# Altium PCB DC_PCB.PcbDoc
Units mm, origin at the board's own origin, x right, y up, seen from the top; angles counter-clockwise.
Board outline 69.6 x 80.01 mm, 2 copper layers (Top Layer, Bottom Layer); 24 components, 20 nets, 112 pads, 0 vias.
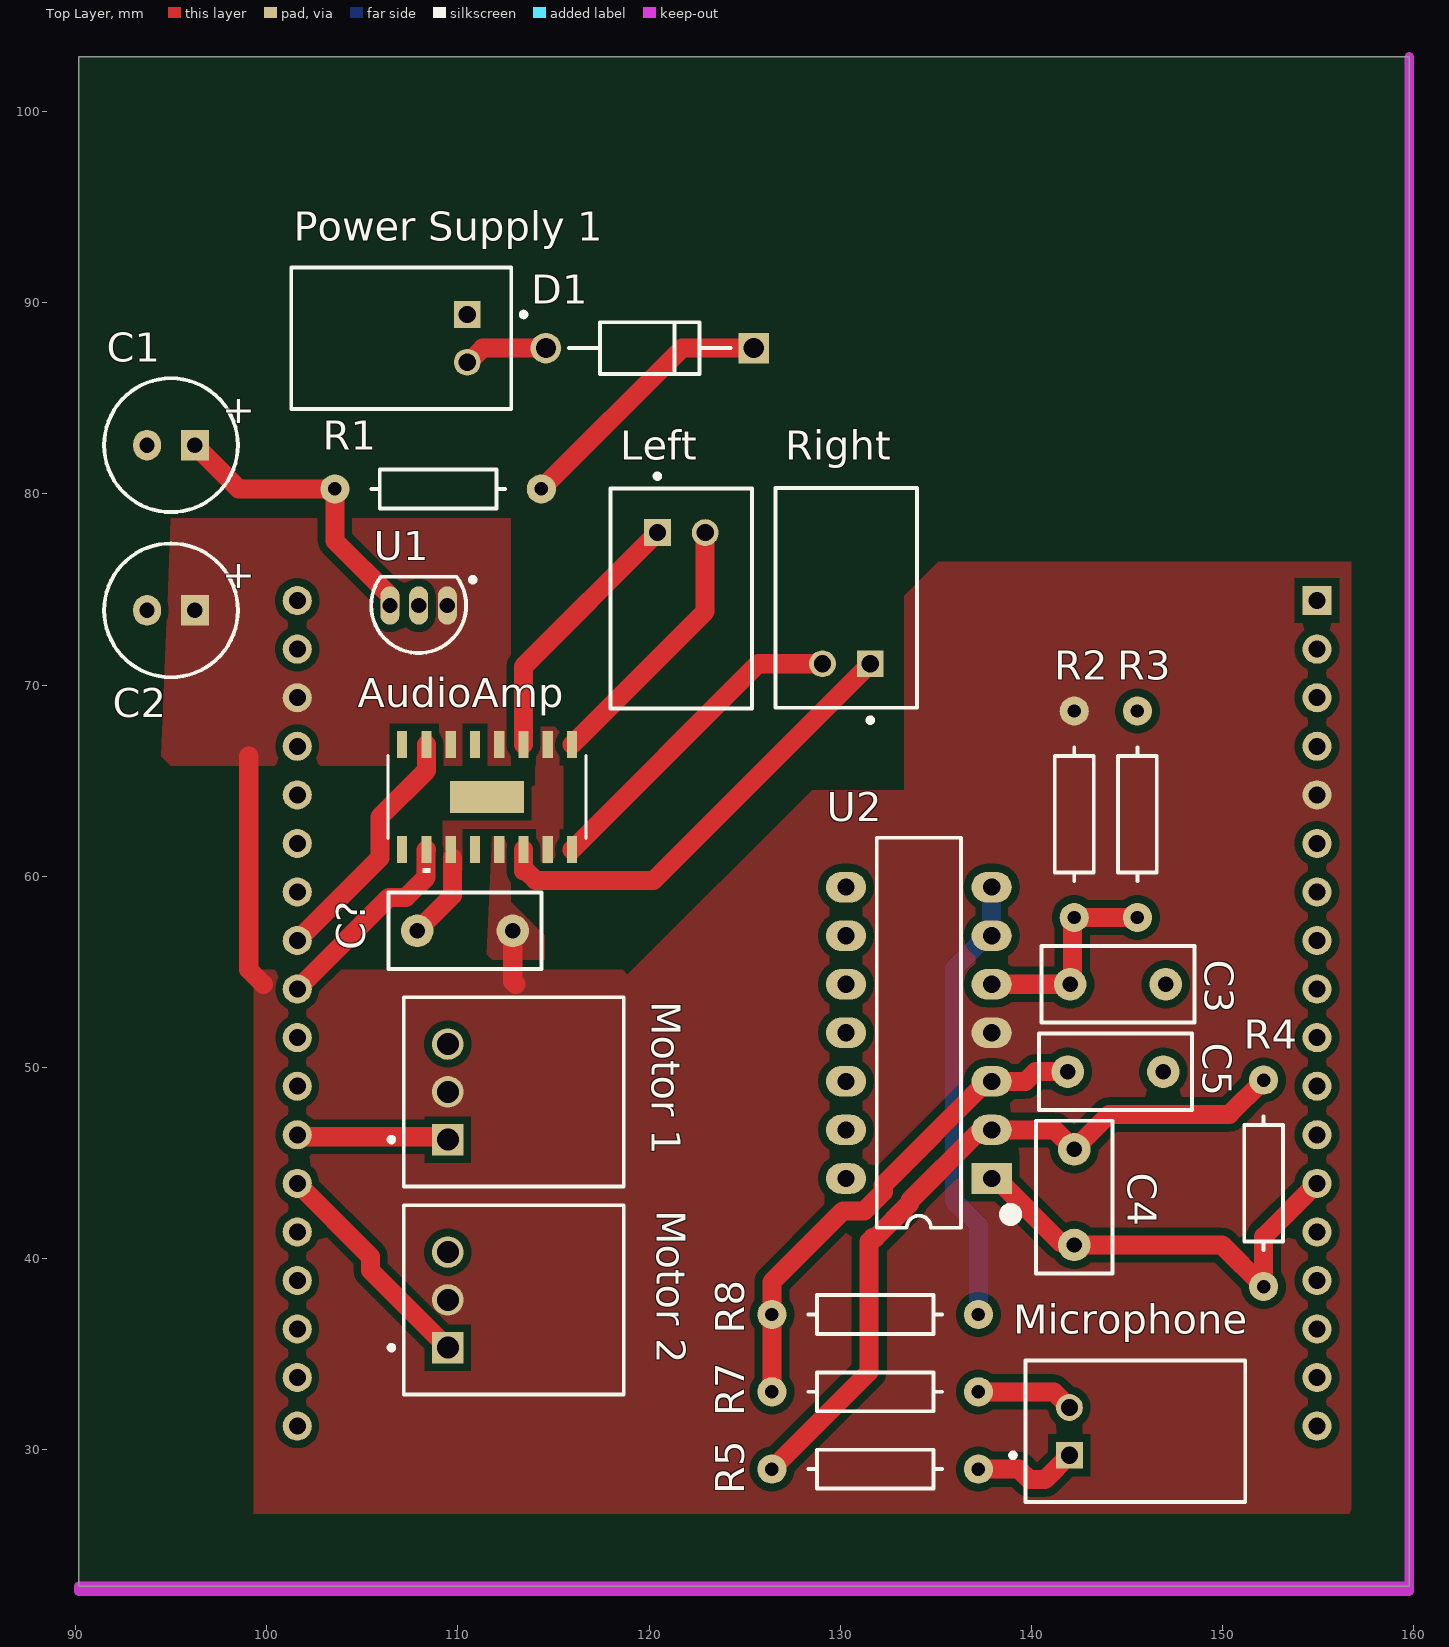
[diagram p0: Top Layer view]
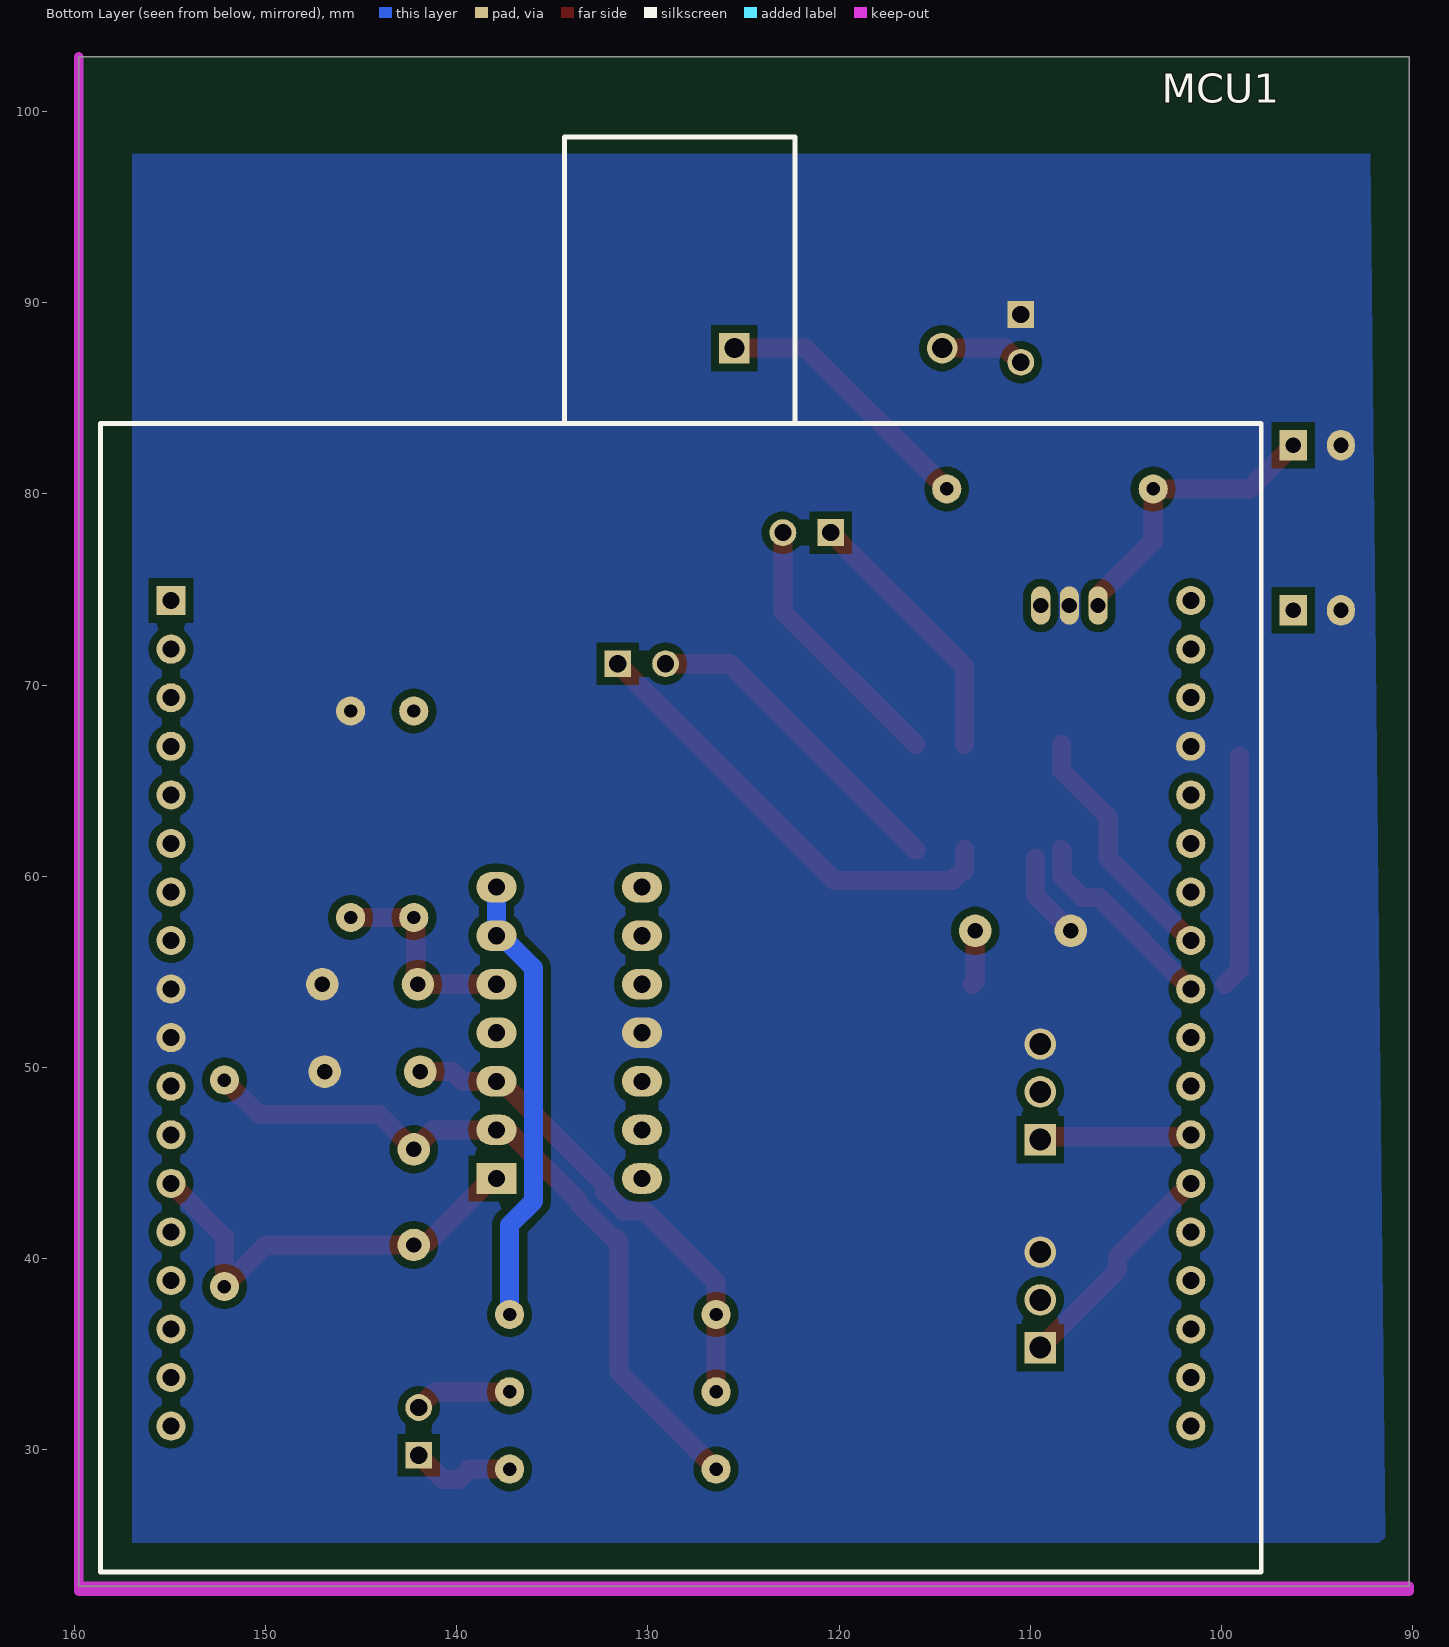
[diagram p1: Bottom Layer view, seen from below]
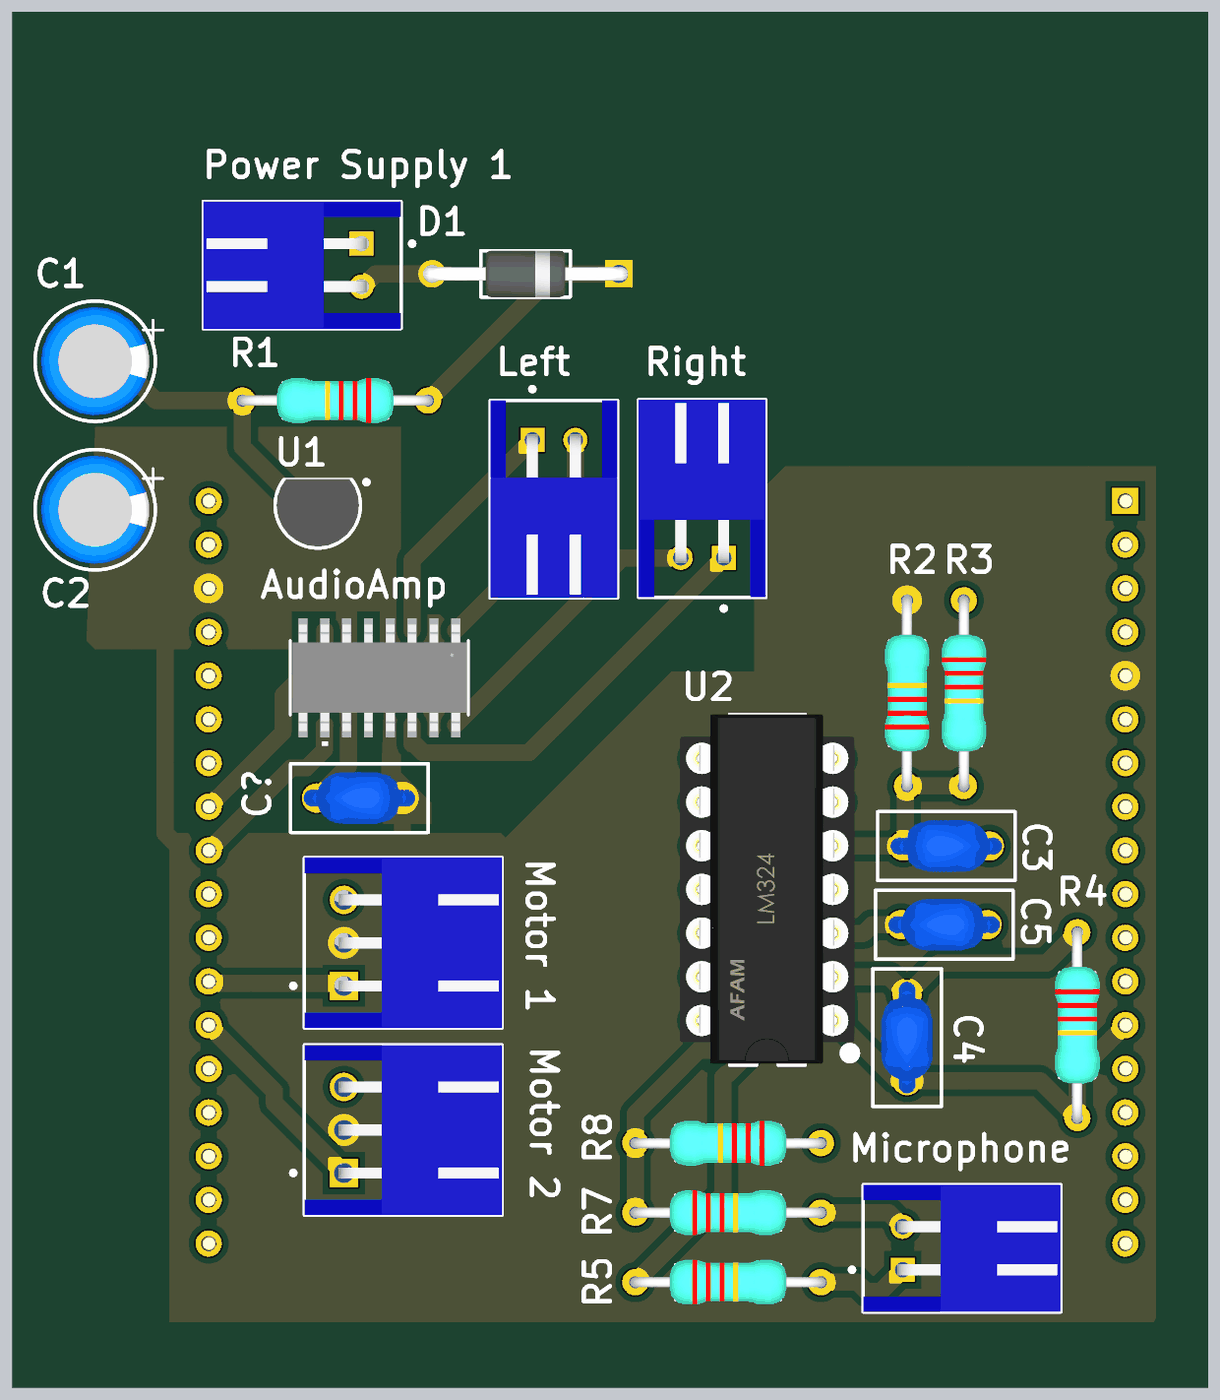
[diagram p2: 3D render of the assembled board from above, using the file's embedded part models]

## Layer stack, top to bottom
Top Solder: solder mask 0.0102, Solder Resist, Dk 3.5
Top Layer: signal copper 0.0356
Dielectric 1: dielectric 0.32, FR-4, Dk 4.8
Bottom Layer: signal copper 0.0356
Bottom Solder: solder mask 0.0102, Solder Resist, Dk 3.5

## Board outline
90.17,22.86 159.766,22.86 159.766,102.87 90.17,102.87

## Design rules (kind name [scope] priority, off if disabled: settings)
BoardOutlineClearance [All] p1: gap=0.5 ignorepadtopadclearanceinfootprint=FALSE
Clearance [All] p1: gap=0.4 ignorepadtopadclearanceinfootprint=FALSE
Height [All] p1: minheight=0 maxheight=50 prefheight=12.7
HoleSize [All] p1: absolutevalues=TRUE maxlimit=10 minlimit=0.4 maxpercent=80.000 minpercent=20.000
MinimumAnnularRing [All] p1: minimumring=0.076
MinimumSolderMaskSliver [All] p1: minsoldermaskwidth=0.1
PlaneConnect [All] p1: planeconnectstyle=Relief reliefexpansion=0.6 reliefentries=4 reliefconductorwidth=0.6 reliefairgap=0.4
PolygonConnect PolygonConnect_1 [All] p1: connectstyle=Direct reliefconductorwidth=0.6 reliefentries=4 polygonreliefangle="90 Angle" airgapwidth=0.4
RoutingVias [All] p1: holewidth=0.6 width=1 viastyle="Through Hole" minholewidth=0.5 minwidth=0.8 maxholewidth=1 maxwidth=2
SMDToCorner [All] p1: distance=157480
SilkToSilkClearance [All] p1: silktosilkclearance=0.1
SilkToSolderMaskClearance [IsPad] p1: minsilkscreentomaskgap=0.1 clearancetoexposedcopper=TRUE
SolderMaskExpansion [All] p1: expansion=0.102 istentingtop=FALSE
SupplyNets "Schematic Supply Nets_13" [InNet('Vsrp')] p1: voltage=0.000
SupplyNets "Schematic Supply Nets_12" [InNet('Vsrn')] p2: voltage=0.000
SupplyNets "Schematic Supply Nets_11" [InNet('Vsln')] p3: voltage=0.000
SupplyNets "Schematic Supply Nets_10" [InNet('Vslp')] p4: voltage=0.000
SupplyNets "Schematic Supply Nets_9" [InNet('Vm2')] p5: voltage=0.000
SupplyNets "Schematic Supply Nets_8" [InNet('Vmica')] p6: voltage=0.000
SupplyNets "Schematic Supply Nets_7" [InNet('+5')] p7: voltage=0.000
SupplyNets "Schematic Supply Nets_6" [InNet('GND')] p8: voltage=0.000
SupplyNets "Schematic Supply Nets_5" [InNet('Vm1')] p9: voltage=0.000
SupplyNets "Schematic Supply Nets_4" [InNet('Vlc')] p10: voltage=0.000
SupplyNets "Schematic Supply Nets_3" [InNet('V2.1')] p11: voltage=0.000
SupplyNets "Schematic Supply Nets_2" [InNet('Vmn')] p12: voltage=0.000
SupplyNets "Schematic Supply Nets_1" [InNet('Vmp')] p13: voltage=0.000
SupplyNets "Schematic Supply Nets" [InNet('Vrc')] p14: voltage=0.000
Width [All] p1: maxlimit=10 minlimit=0.4 preferedwidth=0.6
24 further rules are at their usual default settings.

## Components (designator, comment, footprint, x,y, rotation, side; value= is the part's Value field where it differs from the comment)
AudioAmp "PAM8406ER" PAM8406ER_DIO 111.531,64.144 r270 top (schematic designator AudioAmp1)
C1 "*" "CAP-RAD-2.5mm Pitch" 94.996,82.55 r180 top
C2 "*" "CAP-RAD-2.5mm Pitch" 94.996,73.914 r180 top
C3 "*" CCAP-5P0 144.526,54.356 r0 top
C4 "*" CCAP-5P0 142.24,43.22 r270 top
C5 "*" CCAP-5P0 144.401,49.784 r180 top
C? "*" CCAP-5P0 110.374,57.15 r180 top
D1 "1N4007" 1N4007-MFG 120.038,87.63 r180 top
Left "S2B-XH-A(LF)(SN)" JST-S2B-XH-A(LF)(SN)_V 121.686,77.978 r0 top (schematic designator "Speaker Left")
MCU1 "ATmega328PB Xplained Mini Header" "ATmeg328P Xplained" 128.27,52.832 r180 bottom
Microphone "S2B-XH-A(LF)(SN)" JST-S2B-XH-A(LF)(SN)_V 141.986,30.968 r90 top
"Motor 1" "S3B-XH-A(LF)(SN)" JST-S3B-XH-A(LF)(SN)_V 109.474,48.728 r90 top
"Motor 2" "S3B-XH-A(LF)(SN)" JST-S3B-XH-A(LF)(SN)_V 109.474,37.846 r90 top
"Power Supply 1" "S2B-XH-A(LF)(SN)" JST-S2B-XH-A(LF)(SN)_V 110.49,88.138 r270 top
R1 "*" AXIAL-0.4 108.966,80.264 r180 top
R2 "*" AXIAL-0.4 142.24,63.246 r90 top
R3 "*" AXIAL-0.4 145.542,63.246 r270 top
R4 "*" AXIAL-0.4 152.146,43.942 r270 top
R5 "*" AXIAL-0.4 131.826,28.993 r0 top
R7 "*" AXIAL-0.4 131.826,33.039 r0 top
R8 "*" AXIAL-0.4 131.826,37.084 r180 top
Right "S2B-XH-A(LF)(SN)" JST-S2B-XH-A(LF)(SN)_V 130.322,71.12 r180 top (schematic designator "Speaker Right")
U1 "L78L05ACZ" TO-92 107.95,74.168 r90 top
U2 "LM324" DIP-14 134.112,51.816 r180 top

## Footprints (in the part's own frame and the unit in brackets; to place one, negate y for a bottom-side part, rotate by r counter-clockwise, add the part's x,y. Pads: shape width x height; smd on the part's side, far side on the other; paste and mask are expansions set on the pad)
1N4007-MFG [mm]
  round 1.6 hole 1.05 paste-2539.97 mask+0: 1(5.438,0)
  rect 1.6x1.6 hole 1.05 paste-2539.97 mask+0: 2(-5.438,0)
  silkscreen extent -4.24,-1.35 4.24,1.35, body extent -6.34,-1.45 6.34,1.45, height 0.25
"ATmeg328P Xplained" [mil]
  rect 60x60 hole 35: 1(-1050,850)
  round 60 hole 35: 2(-1050,750) 3(-1050,650) 4(-1050,550) 5(-1050,450) 6(-1050,350) 7(-1050,250) 8(-1050,150) 9(-1050,50) 10(-1050,-50) 11(-1050,-150) 12(-1050,-250) 13(-1050,-350) 14(-1050,-450) 15(-1050,-550) 16(-1050,-650) 17(-1050,-750) 18(-1050,-850) 19(1050,-850) 20(1050,-750) 21(1050,-650) 22(1050,-550) 23(1050,-450) 24(1050,-350) 25(1050,-250) 26(1050,-150) 27(1050,-50) 28(1050,50) 29(1050,150) 30(1050,250) 31(1050,350) 32(1050,450) 33(1050,550) 34(1050,650) 35(1050,750) 36(1050,850)
  silkscreen extent -1195,-1150 1195,1805, body extent -1201,-1150 1161,1845, height 452
AXIAL-0.4 [mm]
  round 1.524 hole 0.7: 1(-5.4,0) 2(5.4,0)
  silkscreen extent -3.5,-1.02 3.5,1.02, body extent -5.7,-1.3 5.7,1.3, height 2.7
"CAP-RAD-2.5mm Pitch" [mm] "Cap 6.3 X 11.2"
  rect 1.45x1.6 hole 0.8: 1(-1.25,0)
  oval 1.45x1.6 hole 0.8: 2(1.25,0)
  silkscreen extent -3.5,-3.5 3.5,3.5, body extent -3.15,-3.15 3.15,3.15, height 11.5
CCAP-5P0 [mm]
  round 1.7 hole 0.8: 1(-2.5,0) 2(2.5,0)
  silkscreen extent -4,-2 4,2, body extent -3.25,-1.5 3.25,1.5, height 6.5
DIP-14 [mm] "DIP; 14 Leads; Row Spacing 7.62 mm; Pitch 2.54 mm"
  rect 2.1x1.6 hole 0.9: 1(-3.81,7.62)
  oval 2.1x1.6 hole 0.9: 2(-3.81,5.08) 3(-3.81,2.54) 4(-3.81,0) 5(-3.81,-2.54) 6(-3.81,-5.08) 7(-3.81,-7.62) 8(3.81,-7.62) 9(3.81,-5.08) 10(3.81,-2.54) 11(3.81,0) 12(3.81,2.54) 13(3.81,5.08) 14(3.81,7.62)
  silkscreen extent -5.1,-10.2 2.2,10.2, body extent -5.07,-10.2 5.09,10.12, height 9.47
JST-S2B-XH-A(LF)(SN)_V [mm] "Header, 2-Leads, Body 7.4x11.5mm, Pitch 2.5mm"
  rect 1.4x1.4 hole 0.9: 1(-1.25,0)
  round 1.4 hole 0.9: 2(1.25,0)
  silkscreen extent -3.7,-9.2 3.7,3.08, body extent -3.7,-9.2 3.7,2.3, height 5.95
JST-S3B-XH-A(LF)(SN)_V [mm] "Header, 3-Leads, Body 9.9x11.5mm, Pitch 2.5mm"
  rect 1.65x1.65 hole 1.15: 1(-2.5,0)
  round 1.65 hole 1.15: 2(0,0) 3(2.5,0)
  silkscreen extent -4.95,-9.2 4.95,3.07, body extent -4.95,-9.2 4.95,2.3, height 6.15
PAM8406ER_DIO [mil]
  rect 55.55x21 smd paste+0 mask+0: 1(-108.27,175) 2(-108.27,125) 3(-108.27,75) 4(-108.27,25) 5(-108.27,-25) 6(-108.27,-75) 7(-108.27,-125) 8(-108.27,-175) 9(108.27,-175) 10(108.27,-125) 11(108.27,-75) 12(108.27,-25) 13(108.27,25) 14(108.27,75) 15(108.27,125) 16(108.27,175)
  rect 66x152 smd paste-75.5 mask+0: EPAD(0,0)
  silkscreen extent -86,-204 156,204, body extent -122,-199 122,199, height 69
TO-92 [mm] "TO, Flat Index; 3 In-Line, Axial Leads; Body Dia. 4.5mm; Leads 0.51 x 0.48 mm (max)"
  oval 2x1 hole 0.8: 1(0,-1.5) 2(0,0) 3(0,1.5)
  silkscreen extent -2.48,-2.96 1.5,2.48, body extent -2.4,-2.4 1.53,2.4, height 6.73

## Part data
AudioAmp: "Description", Manufacturer_Name="Diodes Inc", Copyright="Copyright (C) 2025 Ultra Librarian. All rights reserved.", Manufacturer_Part_Number=PAM8406ER, RefDes=RefDes, Type=Type
C1 C2: library part ElecCap_TH_2P0, "Electrolytic capacitor with radial package, 2mm pitch and 5.2mm diameter", LatestRevisionDate=17-Jul-2002, LatestRevisionNote="Re-released for DXP Platform.", PackageDescription="Polarized Capacitor; 2 Leads", PackageReference=POLAR0.8, Published=8-Jun-2000, Publisher="Altium Limited"
C3 C4 C5 C?: library part CerCap_TH_5P0, "TH ceramic capacitor with 5mm pitch"
D1: library part 1N4007_TH_4AX0, "1N4007 1000V standard axial diode", Supplier Part Number 1=1N4007RLGOSCT-ND, ComponentLink1Description=https://www.fairchildsemi.com/datasheets/1N/1N914.pdf, ComponentLink1URL=https://www.fairchildsemi.com/datasheets/1N/1N914.pdf, Supplier 1=Digi-Key
Left Microphone "Power Supply 1" Right: library part CMP-002-00032-2, "Male Header, Pitch 2.5 mm, 1 x 2 Position, Height 6.1 mm, Tail Length 3.4 mm, -25 to 85 degC, RoHS, Bulk", Manufacturer=JST, Max Operating Temperature=85°C, Min Operating Temperature=-25°C, Package Description="XH Series Disconnectable Crimp Style Connector, Pitch 2.5 mm, 1 x 2 Position, Height 6.1 mm, Tail Length 3.4 mm", Case/Package=S2B-XH-A(LF)(SN), Connector Type=Header, Datasheet URL=http://www.jst-mfg.com/product/pdf/eng/eXH.pdf, Datasheet Version=May-16, Gender=Male, Manufacturer URL=http://www.jst.com/home2.html, Mounting Technology=TH, Package Reference=S2B-XH-A(LF)(SN), RoHS Compliant=Unknown
MCU1: library part ATmega328PBXplained_TH, "Dual 18-pin headers connecting to ATmega328PB Xplained Mini", Manufacturer="Microchip Technology", Manufacturer Part Number=ATMEGA328PB-XMINI, Operating System=-, Supplier Part Number 1=ATMEGA328PB-XMINI-ND, Board Type="Evaluation Platform", Category="Development Boards, Kits, Programmers", ComponentLink1Description=http://www.microchip.com/mymicrochip/filehandler.aspx?ddocname=en589665, ComponentLink1URL=http://www.microchip.com/mymicrochip/filehandler.aspx?ddocname=en589665, Contents=Board(s), Core Processor=AVR, For Use With/Related Products=ATmega328P, Mounting Type=Fixed, Part Status=Active, Platform="ATmega328P Xplained Mini", Pricing 1="1=15.11 (NZD)", RoHS="RoHS Compliant", Stock 1=454, Supplier 1=Digi-Key, Type="MCU 8-Bit"
"Motor 1" "Motor 2": library part CMP-002-00033-2, "Male Header, Pitch 2.5 mm, 1 x 3 Position, Height 6.1 mm, Tail Length 3.4 mm, -25 to 85 degC, RoHS, Bulk", Manufacturer=JST, Max Operating Temperature=85°C, Min Operating Temperature=-25°C, Package Description="Male Header, Pitch 2.5 mm, 1 x 3 Position, Height 6.1 mm, Tail Length 3.4 mm", Case/Package=S3B-XH-A(LF)(SN), Connector Type=Header, Datasheet URL=http://www.jst-mfg.com/product/pdf/eng/eXH.pdf, Datasheet Version=May-16, Gender=Male, Manufacturer URL=http://www.jst.com/home2.html, Mounting Technology=TH, Package Reference=S3B-XH-A(LF)(SN), RoHS Compliant=Unknown
R1 R2 R3 R4 R5 R7 R8: library part Res_TH_0AX4, "Through hole resistor", ComponentLink1Description=http://www.royalohm.com/pdf/product2017/PrecisionMetalMF.pdf, LatestRevisionDate=17-Jul-2002, LatestRevisionNote="Re-released for DXP Platform.", PackageReference=AXIAL-0.4, Published=8-Jun-2000, Publisher="Altium Limited"
U1: library part L78L05_TH_TO92, "Voltage Regulator 5V", Base Part Number=LM78L05, Current - Output=100mA, Manufacturer="ON Semiconductor", Manufacturer Part Number=LM78L05ACZX, Operating Temperature="-40°C ~ 125°C", Package / Case="TO-226-3, TO-92-3 (TO-226AA) (Formed Leads)", Supplier Device Package=TO-92-3, Supplier Part Number 1=LM78L05ACZXCT-ND, Voltage - Input (Max)=30V, Voltage - Output (Max)=-, Voltage - Output (Min/Fixed)=5V, Category="Integrated Circuits (ICs)", ComponentLink1Description=https://www.fairchildsemi.com/datasheets/MC/MC78L05A.pdf, ComponentLink1URL=https://www.fairchildsemi.com/datasheets/MC/MC78L05A.pdf, Control Features=-, Mounting Type="Through Hole", Output Configuration=Positive, Output Type=Fixed, Packaging="Cut Tape (CT)", Part Status=Active, Pricing 1="1=0.69, 10=0.517, 100=0.3226, 500=0.2207, 1000=0.16976 (NZD)", Protection Features="Over Temperature, Short Circuit", PSRR="80dB (120Hz)", RoHS="RoHS Compliant", Stock 1=7782, Supplier 1=Digi-Key, Voltage Dropout (Max)=-
U2: library part LM324N_TH_DIP16, "IC OPAMP GP 14DIP", Current - Supply=1mA, Manufacturer="ON Semiconductor", Manufacturer Part Number=LM324N, Operating Temperature="0°C ~ 70°C", Package / Case="14-DIP (0.300\", 7.62mm)", Supplier Device Package=14-DIP, Supplier Part Number 1=LM324NFS-ND, Voltage - Supply, Single/Dual (±)="3 V ~ 32 V, ±1.5 V ~ 16 V", Amplifier Type="General Purpose", Base Part Number=LM324, Category="Integrated Circuits (ICs)", ComponentLink1Description=https://www.fairchildsemi.com/datasheets/LM/LM2902.pdf, ComponentLink1URL=https://www.fairchildsemi.com/datasheets/LM/LM2902.pdf, Mounting Type="Through Hole", Output Type=-, Packaging=Tube, Part Status=Active, Pricing 1="1=0.9, 10=0.775, 100=0.5789, 500=0.45482, 1000=0.35145 (NZD)", RoHS="RoHS Compliant", Slew Rate=-, Stock 1=2900, Supplier 1=Digi-Key

## Nets (pads, with @x,y where several pads share a name; then routed paths per layer and width w, separated by ;. In a path a pad name is that pad's centre, name@x,y a point inside that pad or via, vN(x,y) a via of type N, cw(c..) or ccw(c..) an arc to the next point about the centre after c; other vN are vias at no path point)
+5: "Motor 1.2" "Motor 2.2" AudioAmp.4 AudioAmp.6 AudioAmp.13 C2.1 C?.1 MCU1.5 MCU1.34 R2.2 U1.1 U2.4 | length 15.1
  Top Layer w1: 99.06,66.294 99.06,55.118 99.822,54.356 ; C?.1 112.874,54.512 113.03,54.356
GND: "Motor 1.3" "Motor 2.3" "Power Supply 1.1" AudioAmp.2 AudioAmp.11 AudioAmp.15 C1.2 C2.2 C3.2 C5.1 C?.2 MCU1.9 MCU1.10 MCU1.33 R3.1 U1.2 U2.11 | length 4.6
  Top Layer w1: C?.2 109.73,59.006 AudioAmp.11@109.73,60.96
NetC1_1: C1.1 R1.2 U1.3 | length 15.6
  Top Layer w1: C1.1 96.246,82.475 96.471,82.25 96.546,82.25 98.532,80.264 R1.2 103.566,77.552 106.45,74.668 U1.3
NetC3_1: C3.1 R2.1 R3.2 U2.5 | length 11
  Top Layer w1: U2.5 C3.1 142.14,54.47 142.14,57.746 R2.1 R3.2
NetC4_1: C4.1 R4.1 R5.1 U2.2 | length 39.1
  Top Layer w1: R5.1 131.513,34.08 131.513,40.91 131.699,41.096 131.836,41.096 133.652,42.912 133.652,43.049 137.224,46.621 137.807,46.621 U2.2 141.224,46.736 C4.1 144.068,47.548 150.352,47.548 R4.1
NetC5_2: C5.2 R7.1 R8.2 U2.3 | length 26
  Top Layer w1: R7.1 R8.2 126.426,38.784 130.138,42.496 131.256,42.496 132.252,43.492 132.252,43.856 137.672,49.276 U2.3 139.7,49.276 140.208,49.784 C5.2
NetD1_1: "Power Supply 1.2" D1.1 | length 4.4
  Top Layer w1: 110.49,86.888 110.562,86.888 111.304,87.63 D1.1
NetD1_2: D1.2 R1.1 | length 14.2
  Top Layer w1: R1.1 121.732,87.63 D1.2
V2.1: R8.1 U2.6 U2.7 | length 23.8
  Bottom Layer w1: R8.1 137.226,41.769 135.972,43.023 135.972,55.196 137.672,56.896 U2.6 U2.7
Vlc: AudioAmp.7 MCU1.29 | length 13.1
  Top Layer w1: MCU1.29 105.92,60.962 105.92,63.104 108.356,65.54 AudioAmp.7
Vm1: "Motor 1.1" MCU1.25 | length 8
  Top Layer w1: MCU1.25 101.7,46.382 109.32,46.382 109.474,46.228
Vm2: "Motor 2.1" MCU1.24 | length 11.9
  Top Layer w1: MCU1.24 105.425,40.117 105.425,39.395 109.474,35.346
Vmica: C4.2 MCU1.13 R4.2 U2.1 | length 23.1
  Top Layer w1: U2.1 138.172,44.196 141.514,40.854 142.106,40.854 C4.2 149.968,40.72 R4.2 152.146,41.148 MCU1.13
Vmn: Microphone.1 R5.2 | length 5.5
  Top Layer w1: R5.2 139.342,28.993 139.888,28.448 140.716,28.448 Microphone.1
Vmp: Microphone.2 R7.2 | length 5.1
  Top Layer w1: R7.2 141.165,33.039 Microphone.2
Vrc: AudioAmp.10 MCU1.28 | length 10.6
  Top Layer w1: MCU1.28 106.398,58.9 107.286,58.9 108.33,59.944 108.33,61.368 AudioAmp.10
Vsln: AudioAmp.3 Left.1 | length 14
  Top Layer w1: AudioAmp.3 113.436,70.978 Left.1
Vslp: AudioAmp.1 Left.2 | length 14
  Top Layer w1: AudioAmp.1 122.936,73.854 Left.2
Vsrn: AudioAmp.14 Right.1 | length 24.1
  Top Layer w1: AudioAmp.14 113.436,60.289 113.567,60.289 114.067,59.789 120.241,59.789 Right.1
Vsrp: AudioAmp.16 Right.2 | length 17.1
  Top Layer w1: AudioAmp.16 125.702,71.12 Right.2
pads on no net: AudioAmp.5 AudioAmp.8 AudioAmp.9 AudioAmp.12 AudioAmp.EPAD MCU1.1 MCU1.2 MCU1.3 MCU1.4 MCU1.6 MCU1.7 MCU1.8 MCU1.11 MCU1.12 MCU1.14 MCU1.15 MCU1.16 MCU1.17 MCU1.18 MCU1.19 MCU1.20 MCU1.21 MCU1.22 MCU1.23 MCU1.26 MCU1.27 MCU1.30 MCU1.31 MCU1.32 MCU1.35 MCU1.36 U2.8 U2.9 U2.10 U2.12 U2.13 U2.14

## Polygon pours and split planes (outlines as drawn)
+5 on Top Layer "+5_L01_P007" (solid, pour order 7): 99.314,55.118 99.314,26.67 156.972,26.67 156.718,26.924 156.718,76.454 135.128,76.454 133.35,74.676 133.35,64.516 128.524,64.516 118.872,54.864 118.618,55.118
+5 on Top Layer "+5_L01_P006" (solid, pour order 6): 111.793,62.23 112.776,62.23 112.776,58.674 114.554,56.896 114.554,55.626 111.506,55.626
+5 on Top Layer "+5_L01_P005" (solid, pour order 5): 94.996,78.74 112.776,78.74 112.776,65.786 94.996,65.786 94.488,66.294
GND on Top Layer "GND_L01_P004" (solid, pour order 4): 109.22,60.452 109.22,63.246 113.854,63.246 113.862,63.238 114.046,63.422 114.046,67.818 115.062,67.818 115.316,67.564 115.316,60.706 114.046,60.706 114.046,62.5 110.499,62.5 110.23,62.23 110.23,60.452
GND on Top Layer "GND_L01_P003" (solid, pour order 3): 109.404,60.173 109.404,64.999 114.103,64.999 114.23,64.872 114.23,67.539 115.246,67.539 115.5,67.285 115.5,60.427 114.23,60.427 113.976,60.681 113.976,61.951 110.414,61.951 110.414,60.173
GND on Top Layer "GND_L01_P000" (solid, pour order 0): 114.046,67.818 114.046,62.484 113.792,62.23 109.22,62.23 109.22,60.452 110.49,60.452 110.49,61.976 114.3,61.976 114.3,60.452 115.316,60.452 115.316,67.564 115.062,67.818
GND on Bottom Layer "GND_L02_P002" (solid, pour order 2): 92.202,97.79 156.972,97.79 156.972,25.146 91.694,25.146 91.44,25.4

## Keep-outs
Keep-Out Layer:
  lines w0.5: 90.17,22.606 90.17,22.86 159.766,22.86 159.766,102.87 159.766,22.606 90.17,22.606

## Silkscreen, mask and mechanical layers (free items; w line width, h text height)
Mechanical 1:
  lines w0.5: 90.17,23.114 89.916,23.368 89.916,103.378 160.02,103.378 160.02,22.86 90.17,22.86 ; 90.17,22.86 89.916,23.114 89.916,103.124 160.02,103.124 160.02,22.606 90.17,22.606 90.17,22.86

## Text inside footprints (layer, text, board x,y; h text height)
AudioAmp: Mechanical 13 "*" at 115.24,66.126 h1.27 r270
C1: Top Overlay "+" at 99.396,84.95 h1.5 r180
C2: Top Overlay "+" at 99.396,76.314 h1.5 r180